# Altium PCB PCB2.PcbDoc
Units mm, origin at the board's own origin, x right, y up, seen from the top; angles counter-clockwise.
Board outline 152.4 x 101.6 mm, 2 copper layers (Top Layer, Bottom Layer); 54 components, 82 nets, 204 pads, 0 vias.
Unrouted connection lines stored in the file: 117.
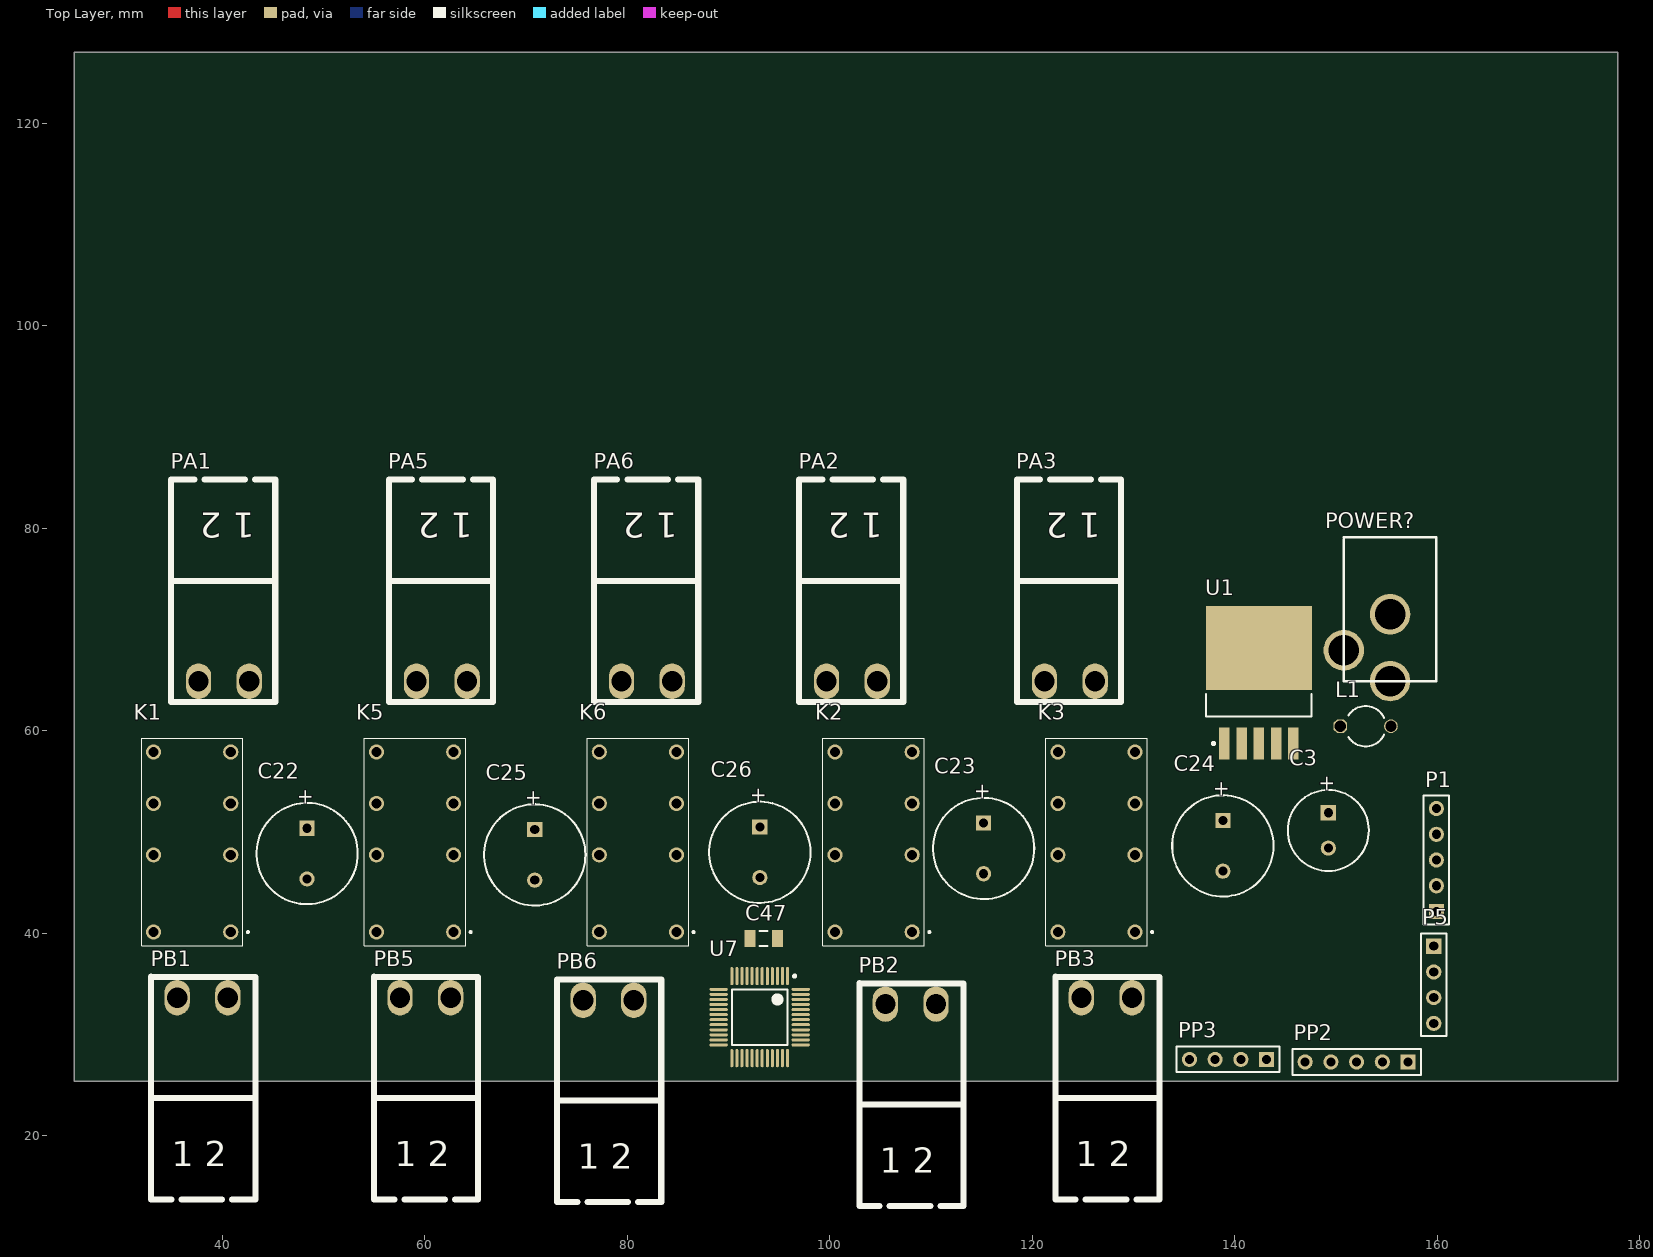
[diagram p0: Top Layer view]
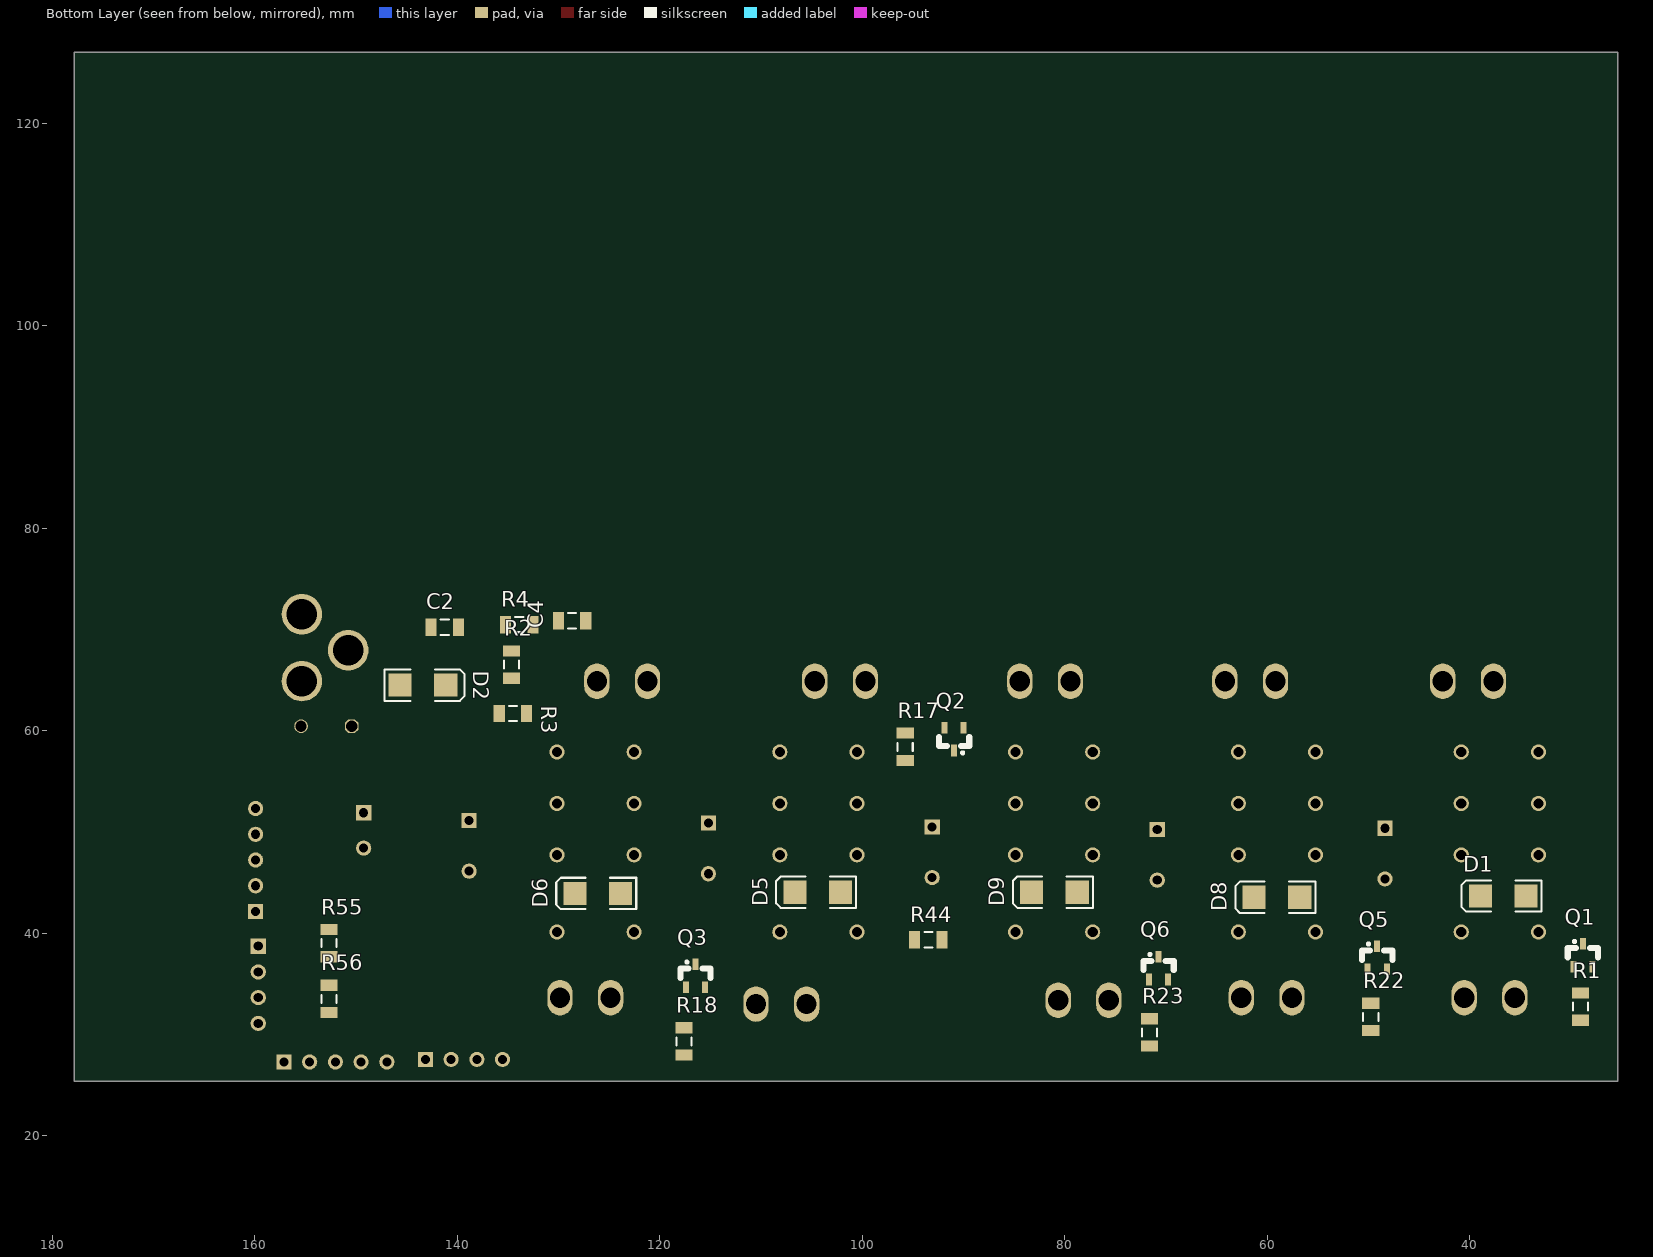
[diagram p1: Bottom Layer view, seen from below]

## Layer stack, top to bottom
Top Solder: solder mask 0.0102, Solder Resist, Dk 3.5
Top Layer: signal copper 0.0356
Dielectric 1: dielectric 0.32, FR-4, Dk 4.8
Bottom Layer: signal copper 0.0356
Bottom Solder: solder mask 0.0102, Solder Resist, Dk 3.5

## Board outline
25.4,25.4 177.8,25.4 177.8,127 25.4,127

## Design rules (kind name [scope] priority, off if disabled: settings)
Clearance [All] p1: gap=0.254 ignorepadtopadclearanceinfootprint=FALSE except(0: Arc-Hole Track-Hole SMDPad-Hole THPad-Hole Via-Hole Fill-Hole Poly-Hole Region-Hole Text-Hole)
PolygonConnect [All] p1: connectstyle=Relief reliefconductorwidth=0.254 reliefentries=4 polygonreliefangle="90 Angle" airgapwidth=0.254
RoutingVias [All] p1: holewidth=0.711 width=1.27 viastyle="Through Hole" minholewidth=0.711 minwidth=1.27 maxholewidth=0.711 maxwidth=1.27
SolderMaskExpansion [All] p1: expansion=0.102
Width [All] p1: maxlimit=0.254 minlimit=0.254 preferedwidth=0.254
30 further rules are at their usual default settings.

## Components (designator, comment, footprint, x,y, rotation, side; value= is the part's Value field where it differs from the comment)
C2 "100nF" 1206 141.224,70.231 r180 bottom
C3 "220 μF; 25 V" E 149.225,50.165 r270 top value=100uF
C4 "15nF" 1206 128.651,70.866 r180 bottom
C22 "470uF" F 48.387,47.879 r270 top
C23 "470uF" F 115.189,48.387 r270 top
C24 "470uF" F 138.811,48.641 r270 top
C25 "470uF" F 70.866,47.752 r270 top
C26 "470uF" F 93.091,48.006 r270 top
C47 "100nF" 1206 93.472,39.497 r180 top
D1 "SM5822" SMB 36.703,43.688 r0 bottom
D2 "SM5822" SMB 143.383,64.516 r180 bottom
D5 "SM5822" SMB 104.394,44.069 r0 bottom
D6 "SM5822" SMB 126.111,43.942 r0 bottom
D8 "SM5822" SMB 59.055,43.561 r0 bottom
D9 "SM5822" SMB 81.026,44.069 r0 bottom
K1 "HJR1-2C-L-05VDC-S-ZY" HJR12CL05VDCSZY 37.338,49.022 r90 top
K2 "HJR1-2C-L-05VDC-S-ZY" HJR12CL05VDCSZY 104.625,49.022 r90 top
K3 "HJR1-2C-L-05VDC-S-ZY" HJR12CL05VDCSZY 126.63,49.022 r90 top
K5 "HJR1-2C-L-05VDC-S-ZY" HJR12CL05VDCSZY 59.344,49.022 r90 top
K6 "HJR1-2C-L-05VDC-S-ZY" HJR12CL05VDCSZY 81.349,49.022 r90 top
L1 "68uH 3.1A (47 33)" CAPR5-4X5 152.908,60.452 r0 top value=10mH
P1 "Programmer" HDR1X5 159.893,42.164 r90 top
P5 "mu_CONNECTOR" HDR1X4 159.639,38.735 r270 top
PA1 "" "phoenix terminal R 2" 45.245,84.836 r180 top
PA2 "" "phoenix terminal R 2" 107.254,84.836 r180 top
PA3 "" "phoenix terminal R 2" 128.771,84.836 r180 top
PA5 "" "phoenix terminal R 2" 66.761,84.836 r180 top
PA6 "" "phoenix terminal R 2" 87.008,84.836 r180 top
PB1 "" "phoenix terminal R 2" 32.987,13.716 r0 top
PB2 "" "phoenix terminal R 2" 102.917,13.081 r0 top
PB3 "" "phoenix terminal R 2" 122.269,13.716 r0 top
PB5 "" "phoenix terminal R 2" 54.99,13.716 r0 top
PB6 "" "phoenix terminal R 2" 73.072,13.462 r0 top
POWER? "POWER" POWERIN 155.321,71.501 r0 top
PP2 "SPI2" HDR1X5 157.099,27.305 r180 top
PP3 "uart3_debugport" HDR1X4 143.129,27.559 r180 top
Q1 "PMBT3904" SOT23_N 28.829,37.846 r90 bottom
Q2 "PMBT3904" SOT23_N 90.932,59.182 r270 bottom
Q3 "PMBT3904" SOT23_N 116.459,35.814 r90 bottom
Q5 "PMBT3904" SOT23_N 49.149,37.592 r90 bottom
Q6 "PMBT3904" SOT23_N 70.739,36.576 r90 bottom
R1 "1k" C1206 29.083,32.766 r270 bottom
R2 "3.3k; 1%" 1206 134.62,66.548 r90 bottom
R3 "10k; 1%" 1206 134.493,61.722 r0 bottom
R4 "10k; 1%" 1206 133.858,70.485 r180 bottom
R17 "1k" C1206 95.758,58.42 r270 bottom
R18 "1k" C1206 117.602,29.337 r270 bottom
R22 "1k" C1206 49.784,31.75 r270 bottom
R23 "1k" C1206 71.628,30.226 r270 bottom
R44 "10K" 1206 93.472,39.37 r180 bottom
R55 "10K" 1206 152.654,39.036 r90 bottom
R56 "10K" 1206 152.654,33.528 r270 bottom
U1 "LM2596S-ADJ" TS5B_N 142.367,64.749 r90 top
U7 "STM32F103C8T6" STM-LQFP48_N 93.077,31.73 r270 top

## Footprints (in the part's own frame and the unit in brackets; to place one, negate y for a bottom-side part, rotate by r counter-clockwise, add the part's x,y. Pads: shape width x height; smd on the part's side, far side on the other; paste and mask are expansions set on the pad)
1206 [mm]
  rect 1.1x1.7 smd: 1(-1.35,0) 2(1.35,0)
  silkscreen extent -0.4,-0.75 0.4,0.75, body extent -1.7,-0.9 1.7,0.9, height 1.3
C1206 [mm]
  rect 1.1x1.7 smd: 1(-1.35,0) 2(1.35,0)
  silkscreen extent -0.4,-0.75 0.4,0.75, body extent -1.7,-0.9 1.7,0.9, height 1.3
CAPR5-4X5 [mm]
  oct 1.35x1.35 hole 1.1: 1(-2.5,0)
  round 1.35 hole 1.1: 2(2.5,0)
  silkscreen extent -1.69,-2 1.82,2
E [mm]
  rect 1.5x1.5 hole 0.9: 1(-1.75,0)
  round 1.5 hole 0.9: 2(1.75,0)
  silkscreen extent -4,-4 4,4
F [mm]
  rect 1.5x1.5 hole 0.9: 1(-2.5,0)
  round 1.5 hole 0.9: 2(2.5,0)
  silkscreen extent -5,-5 5,5
HDR1X4 [mm]
  rect 1.5x1.5 hole 0.9: 1(0,0)
  round 1.5 hole 0.9: 2(2.54,0) 3(5.08,0) 4(7.62,0)
  silkscreen extent -1.27,-1.27 8.89,1.27
HDR1X5 [mm] "Connector; Header; 5 Position"
  rect 1.5x1.5 hole 0.9: 1(0,0)
  round 1.5 hole 0.9: 2(2.54,0) 3(5.08,0) 4(7.62,0) 5(10.16,0)
  silkscreen extent -1.27,-1.27 11.43,1.27
HJR12CL05VDCSZY [mm]
  round 1.5 hole 1: 1(-8.89,-3.51) 4(-1.27,-3.51) 6(3.81,-3.51) 8(8.89,-3.51) 9(8.89,4.11) 11(3.81,4.11) 13(-1.27,4.11) 16(-8.89,4.11)
  silkscreen extent -10.25,-5.3 10.25,5.3, body extent -10.25,-4.7 10.25,5.3, height 11
"phoenix terminal R 2" [mm]
  oval 2.5x3.5 hole 2: 1(2.573,19.939) 2(7.573,19.939)
  silkscreen extent 0,0 10.29,22
POWERIN [mm]
  round 4 hole 3: 1(0.007,-6.593) 2(0.007,0.011) 3(-4.565,-3.545)
  silkscreen extent -4.56,-6.59 4.58,7.63
SMB [mm]
  rect 2.3x2.3 smd: 1(-2.25,0) 2(2.25,0)
  silkscreen extent -3.8,-1.55 4.1,1.55
SOT23_N [mm]
  rect 1.15x0.6 smd: 1(-1.125,0.95) 2(-1.125,-0.95) 3(1.125,0)
  silkscreen extent -0.2,-1.5 1.47,1.5, body extent -0.7,-1.5 0.7,1.5, height 1.1
STM-LQFP48_N [mm] "QFP, 48-Leads, Body 7x7mm, Pitch 0.5mm, IPC Medium Density"
  oval 1.8x0.3 smd: 1(-4.05,2.75) 2(-4.05,2.25) 3(-4.05,1.75) 4(-4.05,1.25) 5(-4.05,0.75) 6(-4.05,0.25) 7(-4.05,-0.25) 8(-4.05,-0.75) 9(-4.05,-1.25) 10(-4.05,-1.75) 11(-4.05,-2.25) 12(-4.05,-2.75) 25(4.05,-2.75) 26(4.05,-2.25) 27(4.05,-1.75) 28(4.05,-1.25) 29(4.05,-0.75) 30(4.05,-0.25) 31(4.05,0.25) 32(4.05,0.75) 33(4.05,1.25) 34(4.05,1.75) 35(4.05,2.25) 36(4.05,2.75)
  oval 0.3x1.8 smd: 13(-2.75,-4.05) 14(-2.25,-4.05) 15(-1.75,-4.05) 16(-1.25,-4.05) 17(-0.75,-4.05) 18(-0.25,-4.05) 19(0.25,-4.05) 20(0.75,-4.05) 21(1.25,-4.05) 22(1.75,-4.05) 23(2.25,-4.05) 24(2.75,-4.05) 37(2.75,4.05) 38(2.25,4.05) 39(1.75,4.05) 40(1.25,4.05) 41(0.75,4.05) 42(0.25,4.05) 43(-0.25,4.05) 44(-0.75,4.05) 45(-1.25,4.05) 46(-1.75,4.05) 47(-2.25,4.05) 48(-2.75,4.05)
  silkscreen extent -4.17,-2.75 2.75,3.58, body extent -3.5,-3.5 3.5,3.5, height 1.6
TS5B_N [mm]
  rect 3.2x1.05 smd: 1(-6,3.4) 2(-6,1.7) 3(-6,0) 4(-6,-1.7) 5(-6,-3.4)
  rect 8.3x10.45 smd: 6(3.45,0)
  silkscreen extent -6.12,-5.2 -1.1,5.2, body extent -3.35,-5.2 6.05,5.2, height 4.65

## Part data
C2 C47: library part Cap-Bipolar, "Bipolar Capacitor", Voltage=100V, Adding Date=1387/12/20, Designer="Saeid Jorablo", Organazation=ControTec
C3: library part 94SH107X0016EBP, "Solid Aluminum Capacitor with Organic Semiconductor Electrolyte: 100uF, 16V, Bulk Pack", ComponentLink1Description="Manufacturer Link", ComponentLink1URL=http://www.vishay.com/, ComponentLink2Description=Datasheet, ComponentLink2URL=http://www.vishay.com/docs/90006/94sh.pdf, DatasheetDocument=23-May-2001, DrillSize="Nominal, Rounded to the nearest 0.1mm", Note="Part Numbers shown are for ± 20% capacitance tolerance (X0).", PackageReference=E, PCB_Layout="Complies with Manufacturer's Recommendation.", Published=19-Mar-2004, Publisher="Altium Limited"
C4 C22 C23 C24 C25 C26: library part Cap, "Capacitor", LatestRevisionDate=17-Jul-2002, LatestRevisionNote="Re-released for DXP Platform.", PackageDescription="Radial Cap, Thru-Hole; 2 Leads; 0.3 in Pin Spacing", PackageReference=RAD-0.3, Published=8-Jun-2000, Publisher="Altium Limited", STATE=NOT-AVAILABLE, TYPE=tantalum
D1 D2 D5 D6 D8 D9: library part "D Schottky", "Schottky Diode", Code_JEDEC=DO-214-AA, LatestRevisionDate=17-Jul-2002, LatestRevisionNote="Re-released for DXP Platform.", PackageDescription="DO-214-AA/SMB; 2 C-Bend Leads; Body 5.3 x 3.6 mm, inc. leads (LxW)", PackageReference=SMB, Published=8-Jun-2000, Publisher="Altium Limited"
K1 K2 K3 K5 K6: "Relay or Contactor", Manufacturer_Name="TIANBO Electronics", Datasheet Link=https://www.schukat.com/schukat/pdf.nsf/index/B12244178CC2A902C125773F002B1B58/$file/2.pdf, Height=11mm, Manufacturer_Part_Number=HJR1-2C-L-05VDC-S-ZY
L1: library part Inductor, "Inductor", Code_IEC=1005, Code_JEITA=0402, LatestRevisionDate=29-May-2009, LatestRevisionNote="IPC-7351 Footprint Added.", PackageDescription="Chip Inductor", PackageReference=0402-A, Published=8-Jun-2000, Publisher="Altium Limited"
P1 PP2: library part "Header 5", "Header, 5-Pin", LatestRevisionDate=17-Jul-2002, LatestRevisionNote="Re-released for DXP Platform.", Publisher="Altium Limited"
P5 PP3: library part "Header 4", "Header, 4-Pin", LatestRevisionDate=17-Jul-2002, LatestRevisionNote="Re-released for DXP Platform.", Publisher="Altium Limited"
PA1 PA2 PA3 PA5 PA6 PB1 PB2 PB3 PB5 PB6: library part "Header 2", "Header, 2-Pin", LatestRevisionDate=17-Jul-2002, LatestRevisionNote="Re-released for DXP Platform.", Publisher="Altium Limited"
POWER?: library part PWR2.5, "Low Voltage Power Supply Connector", ComponentLink1Description="Manufacturer Link", ComponentLink1URL=http://domino.kycon.com/internet/Products.html, DatasheetDocument=09-May-2002, Published=17-Dec-2003, Publisher="Altium Limited"
Q1 Q2 Q3 Q5 Q6: "NPN Switching Transistor", ComponentLink1Description="Manufacturer Link", ComponentLink1URL=http://www.semiconductors.philips.com/, ComponentLink2Description=Datasheet, ComponentLink2URL=http://www.semiconductors.philips.com/acrobat/datasheets/PMBT3904_4.pdf, DatasheetVersion=27-Apr-1999, LatestRevisionDate=12-Dec-2006, LatestRevisionNote="IPC-7351 Footprint Added.", PackageDescription="3-Pin SOT-23 Package 0.95 mm Pitch, 2.3 mm Lead Span", PackageReference=SOT23, PackageVersion=May-1999, Published=17-Sep-2003, Publisher="Altium Limited"
R1 R2 R3 R4 R17 R18 R22 R23 R44 R55 R56: library part Resistor, "Resistor"
U1: "SIMPLE SWITCHER® Power Converter 150 KHz 3A Step-Down Voltage Regulator, 5-pin TO-263", Manufacturer="National Semiconductor", PackageTopMarking="NSUZXYTTE#*LM2596S*-ADJ P+", PowerWise=N, Supplier Part Number 1=1523864, Code_JEDEC=MO-169-AB, ComponentLink1Description="LM2596 Datasheet", ComponentLink1URL=http://www.national.com/ds/LM/LM2596.pdf, ComponentLink2Description="LM2596 Web Page", ComponentLink2URL=http://www.national.com/pf/LM/LM2596.html, ComponentLink3Description="TS5B Package Page", ComponentLink3URL=http://www.national.com/packaging/folders/ts5b.html, CompType=Switcher, DatasheetVersion=May-2002, PackageDescription="TO-263, Molded, .400 x .390 x .180in, 5 Lead, .067in Pitch, Surface Mount", PackageReference=TS5B, PackageVersion="revD, Apr-2005", PartNumber=LM2596S-ADJ, PinCount=5, Published=4-Dec-2008, Publisher="Altium Limited", RoHS=N, Supplier 1=Farnell, Supplier 2=Farnell, Supplier Part Number 2=9494367
U7: "ARM Cortex-M3 32-bit MCU, 64 KB Flash, 20 KB Internal RAM, 37 I/Os, 48-pin LQFP, -40 to 85 degC, Tray", I/Os (High Current)=37, Operating Frequency(F) (Processor speed) (MHz)=72, Supplier Part Number 1=497-6063-ND, Supply Voltage(Vcc) min (V)=2, A/D Converter="2x12-bit (10 Channel)", ComponentLink1Description="Manufacturer URL", ComponentLink1URL=http://www.st.com/web/en/home.html, ComponentLink2Description=Datasheet, ComponentLink2URL=http://www.st.com/st-web-ui/static/active/en/resource/technical/document/datasheet/CD00161566.pdf, ComponentLink3Description="Package Specification", ComponentLink3URL=http://www.st.com/st-web-ui/static/active/en/resource/technical/document/datasheet/DM00058181.pdf, Core="ARM Cortex-M3", DatasheetVersion="Rev. 16", FLASH Size (Prog) (kB)=64, Internal RAM Size (kB)=20, Mounting Technology="Surface Mount", PackageDescription="48-Pin Low Profile Quad Flat Package, 7 x 7 mm Body, 0.5 mm Pitch", PackageReference=LQFP48, PackageVersion="Rev. 6, 06/2013", Packing=Tray, PartNumber=STM32F103C8T6, Supplier 1=Digi-Key, Supplier 2=Farnell, Supplier 3=Newark, Supplier 4=Newark, Supplier 5=Mouser, Supplier Part Number 2=1447637, Supplier Part Number 3=59M2182, Supplier Part Number 4=57P1222, Supplier Part Number 5=511-STM32F103C8T6

## Nets (pads, with @x,y where several pads share a name; then routed paths per layer and width w, separated by ;. In a path a pad name is that pad's centre, name@x,y a point inside that pad or via, vN(x,y) a via of type N, cw(c..) or ccw(c..) an arc to the next point about the centre after c; other vN are vias at no path point)
3.3V: P5.1 PP2.1 PP3.1 R44.1 R55.1 R56.1 U7.1 U7.9 U7.24 U7.36 U7.48
GND: C2.2 C3.2 C22.1 C23.1 C24.1 C25.1 C26.1 C47.2 D2.1 P1.2 P5.4 POWER?.2 POWER?.3 PP2.5 PP3.4 Q1.2 Q2.2 Q3.2 Q5.2 Q6.2 R4.2 U1.3 U1.5 U1.6 U7.8 U7.23 U7.35 U7.47
NetC4_1: C4.1 R2.2 R3.1 U1.4
NetC45_2: U7.3
NetC46_2: U7.4
NetC48_2: U7.5
NetC49_2: U7.6
NetD1_1: D1.1 K1.16 Q1.3
NetD2_2: D2.2 L1.1 U1.2
NetD5_1: D5.1 K2.16 Q2.3
NetD6_1: D6.1 K3.16 Q3.3
NetD7_1: 
NetD8_1: D8.1 K5.16 Q5.3
NetD9_1: D9.1 K6.16 Q6.3
NetK1_4: K1.4 PB1.2
NetK1_8: K1.8 PB1.1
NetK1_9: K1.9 PA1.1
NetK1_13: K1.13 PA1.2
NetK2_4: K2.4 PB2.2
NetK2_8: K2.8 PB2.1
NetK2_9: K2.9 PA2.1
NetK2_13: K2.13 PA2.2
NetK3_4: K3.4 PB3.2
NetK3_8: K3.8 PB3.1
NetK3_9: K3.9 PA3.1
NetK3_13: K3.13 PA3.2
NetK4_4: 
NetK4_8: 
NetK4_9: 
NetK4_13: 
NetK5_4: K5.4 PB5.2
NetK5_8: K5.8 PB5.1
NetK5_9: K5.9 PA5.1
NetK5_13: K5.13 PA5.2
NetK6_4: K6.4 PB6.2
NetK6_8: K6.8 PB6.1
NetK6_9: K6.9 PA6.1
NetK6_13: K6.13 PA6.2
NetQ1_1: Q1.1 R1.1
NetQ2_1: Q2.1 R17.1
NetQ3_1: Q3.1 R18.1
NetQ4_1: 
NetQ5_1: Q5.1 R22.1
NetQ6_1: Q6.1 R23.1
NetR3_2: R3.2 R4.1
RELAY1: R1.2 U7.18
RELAY2: R22.2 U7.19
RELAY3: R23.2 U7.20
RELAY4: R17.2 U7.39
RELAY5: R18.2 U7.40
RELAY6: U7.41
RELAY7: U7.45
RELAY8: U7.46
RELAY9: PP3.2 U7.21
RELAY10: PP3.3 U7.22
RELAY11: U7.25
RELAY12: U7.28
RELAY13: U7.10
RELAY14: U7.11
RELAY15: U7.14
RELAY16: U7.29
RELAY17: U7.30
RELAY18: U7.31
RELAY19: U7.32
RELAY20: U7.33
RELAY21: U7.34
RELAY22: U7.37
RELAY23: U7.38
RELAY24: U7.2
SCL: P5.3 R56.2 U7.42
SDA: P5.2 R55.2 U7.43
U2_NRST: C47.1 P1.5 R44.2 U7.7
U2_RX2: U7.13
U2_SCK: PP2.2 U7.15
U2_SI: PP2.4 U7.17
U2_SO: PP2.3 U7.16
U2_SWCLK: P1.4 U7.27
U2_SWDIO: P1.3 U7.26
U2_TX2: U7.12
V3.3: P1.1
V5: C3.1 C4.2 C22.2 C23.2 C24.2 C25.2 C26.2 D1.2 D5.2 D6.2 D8.2 D9.2 K1.1 K2.1 K3.1 K5.1 K6.1 L1.2 R2.1
V12: C2.1 POWER?.1 U1.1
pads on no net: K1.6 K1.11 K2.6 K2.11 K3.6 K3.11 K5.6 K5.11 K6.6 K6.11 U7.44

## Text inside footprints (layer, text, board x,y; h text height)
C3: Top Overlay "+" at 148.475,55.64 h1.5 r270
C22: Top Overlay "+" at 47.637,54.354 h1.5 r270
C23: Top Overlay "+" at 114.439,54.862 h1.5 r270
C24: Top Overlay "+" at 138.061,55.116 h1.5 r270
C25: Top Overlay "+" at 70.116,54.227 h1.5 r270
C26: Top Overlay "+" at 92.341,54.481 h1.5 r270
PA1: Top Overlay "1 2" at 43.213,81.534 h2.5 r180
PA2: Top Overlay "1 2" at 105.222,81.534 h2.5 r180
PA3: Top Overlay "1 2" at 126.739,81.534 h2.5 r180
PA5: Top Overlay "1 2" at 64.729,81.534 h2.5 r180
PA6: Top Overlay "1 2" at 84.976,81.534 h2.5 r180
PB1: Top Overlay "1 2" at 35.019,17.018 h2.5
PB2: Top Overlay "1 2" at 104.949,16.383 h2.5
PB3: Top Overlay "1 2" at 124.301,17.018 h2.5
PB5: Top Overlay "1 2" at 57.022,17.018 h2.5
PB6: Top Overlay "1 2" at 75.104,16.764 h2.5